# Altium PCB BLHP2432_H24-Fan-Controller.PcbDoc
Units mm, origin at the board's own origin, x right, y up, seen from the top; angles counter-clockwise.
Board outline 55 x 45 mm, 2 copper layers (Top Layer, Bottom Layer), stack 1.569 mm thick; 17 components, 18 nets, 59 pads, 0 vias.
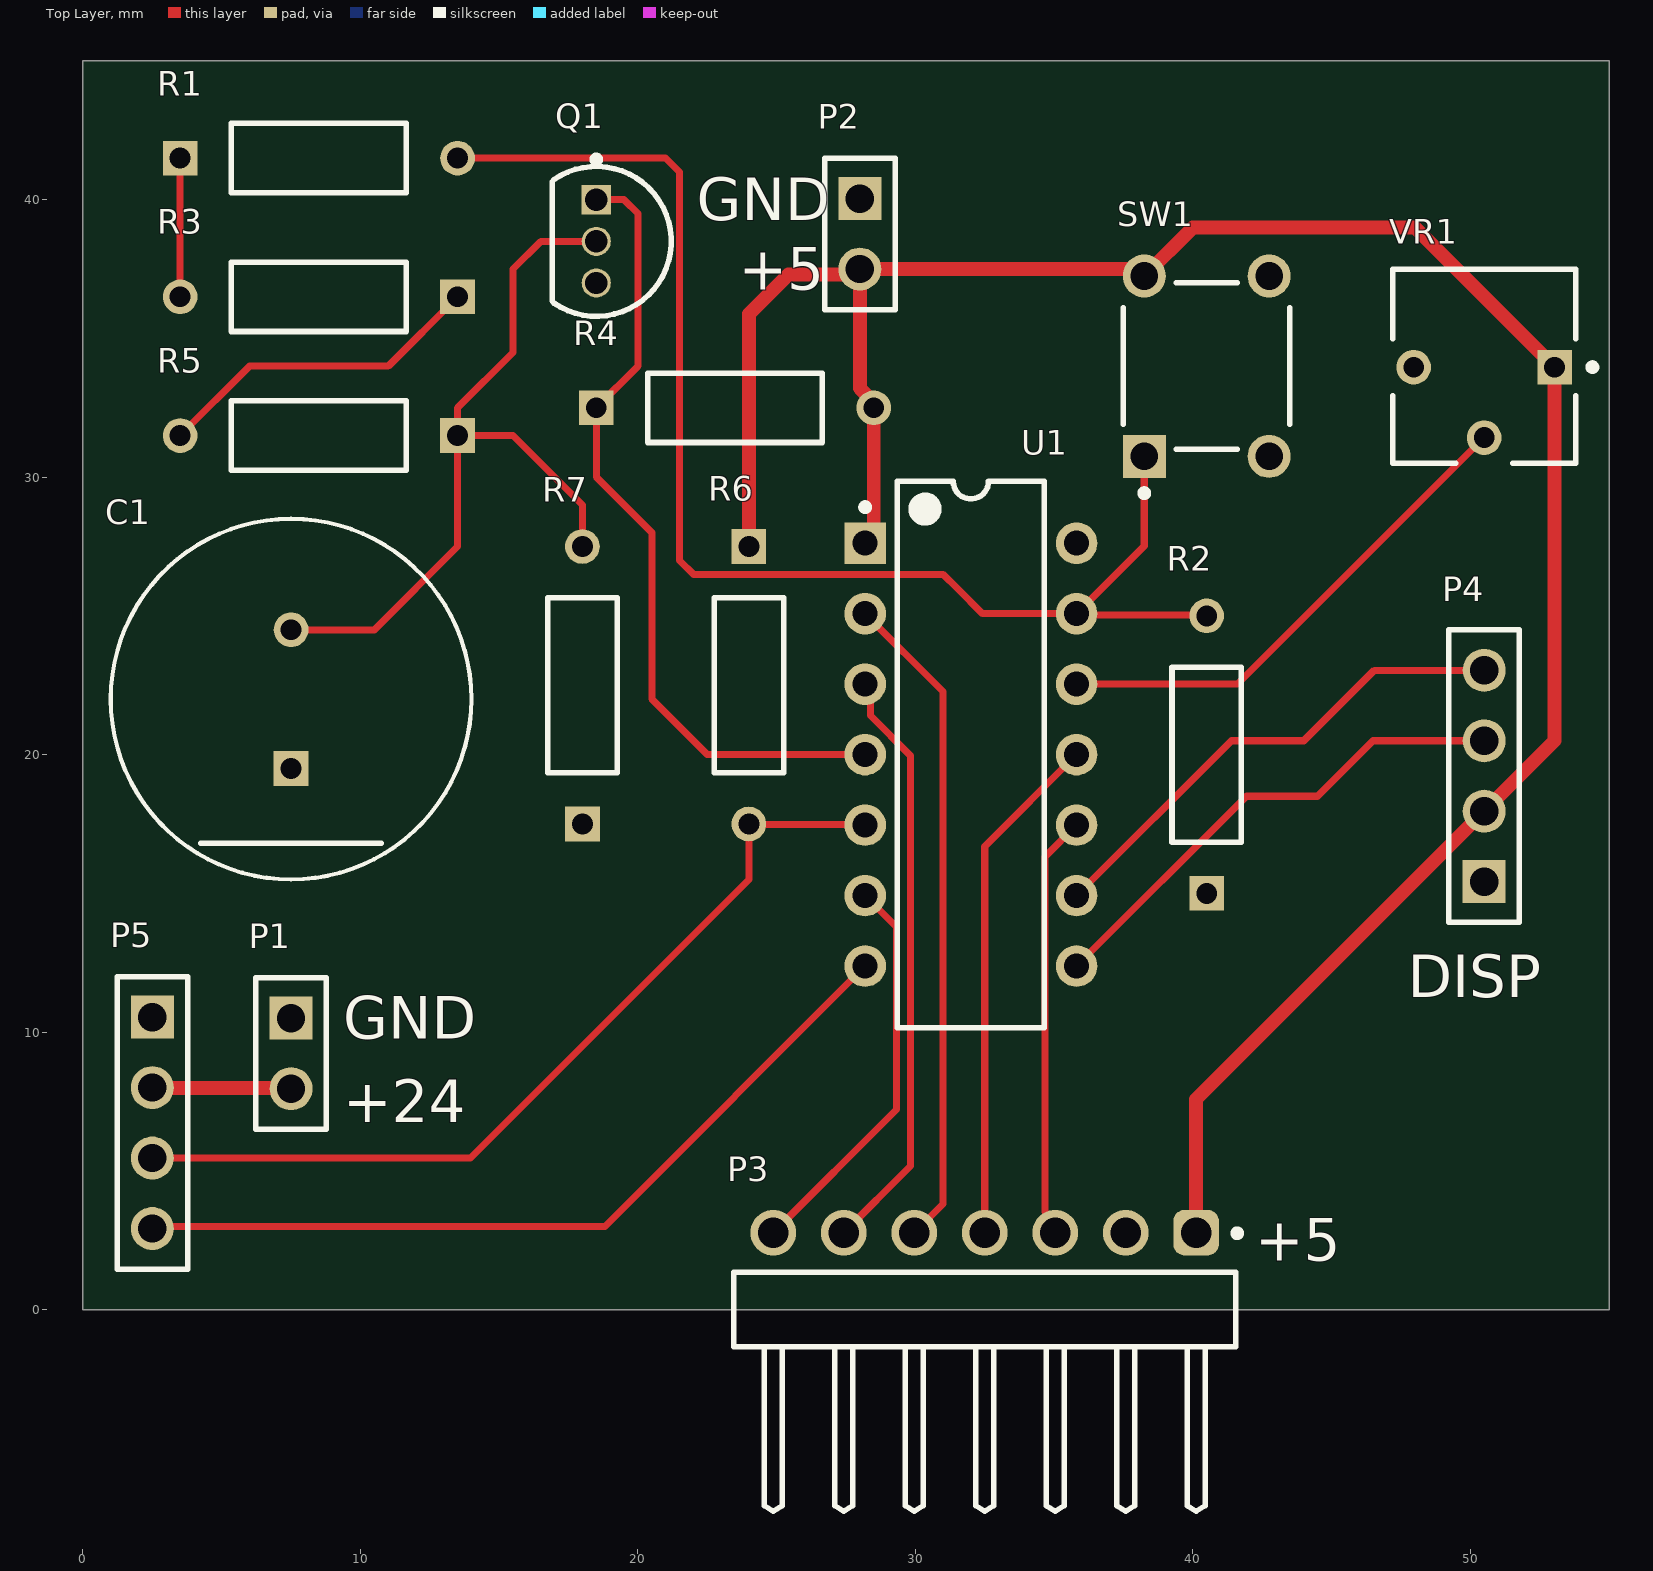
[diagram p0: Top Layer view]
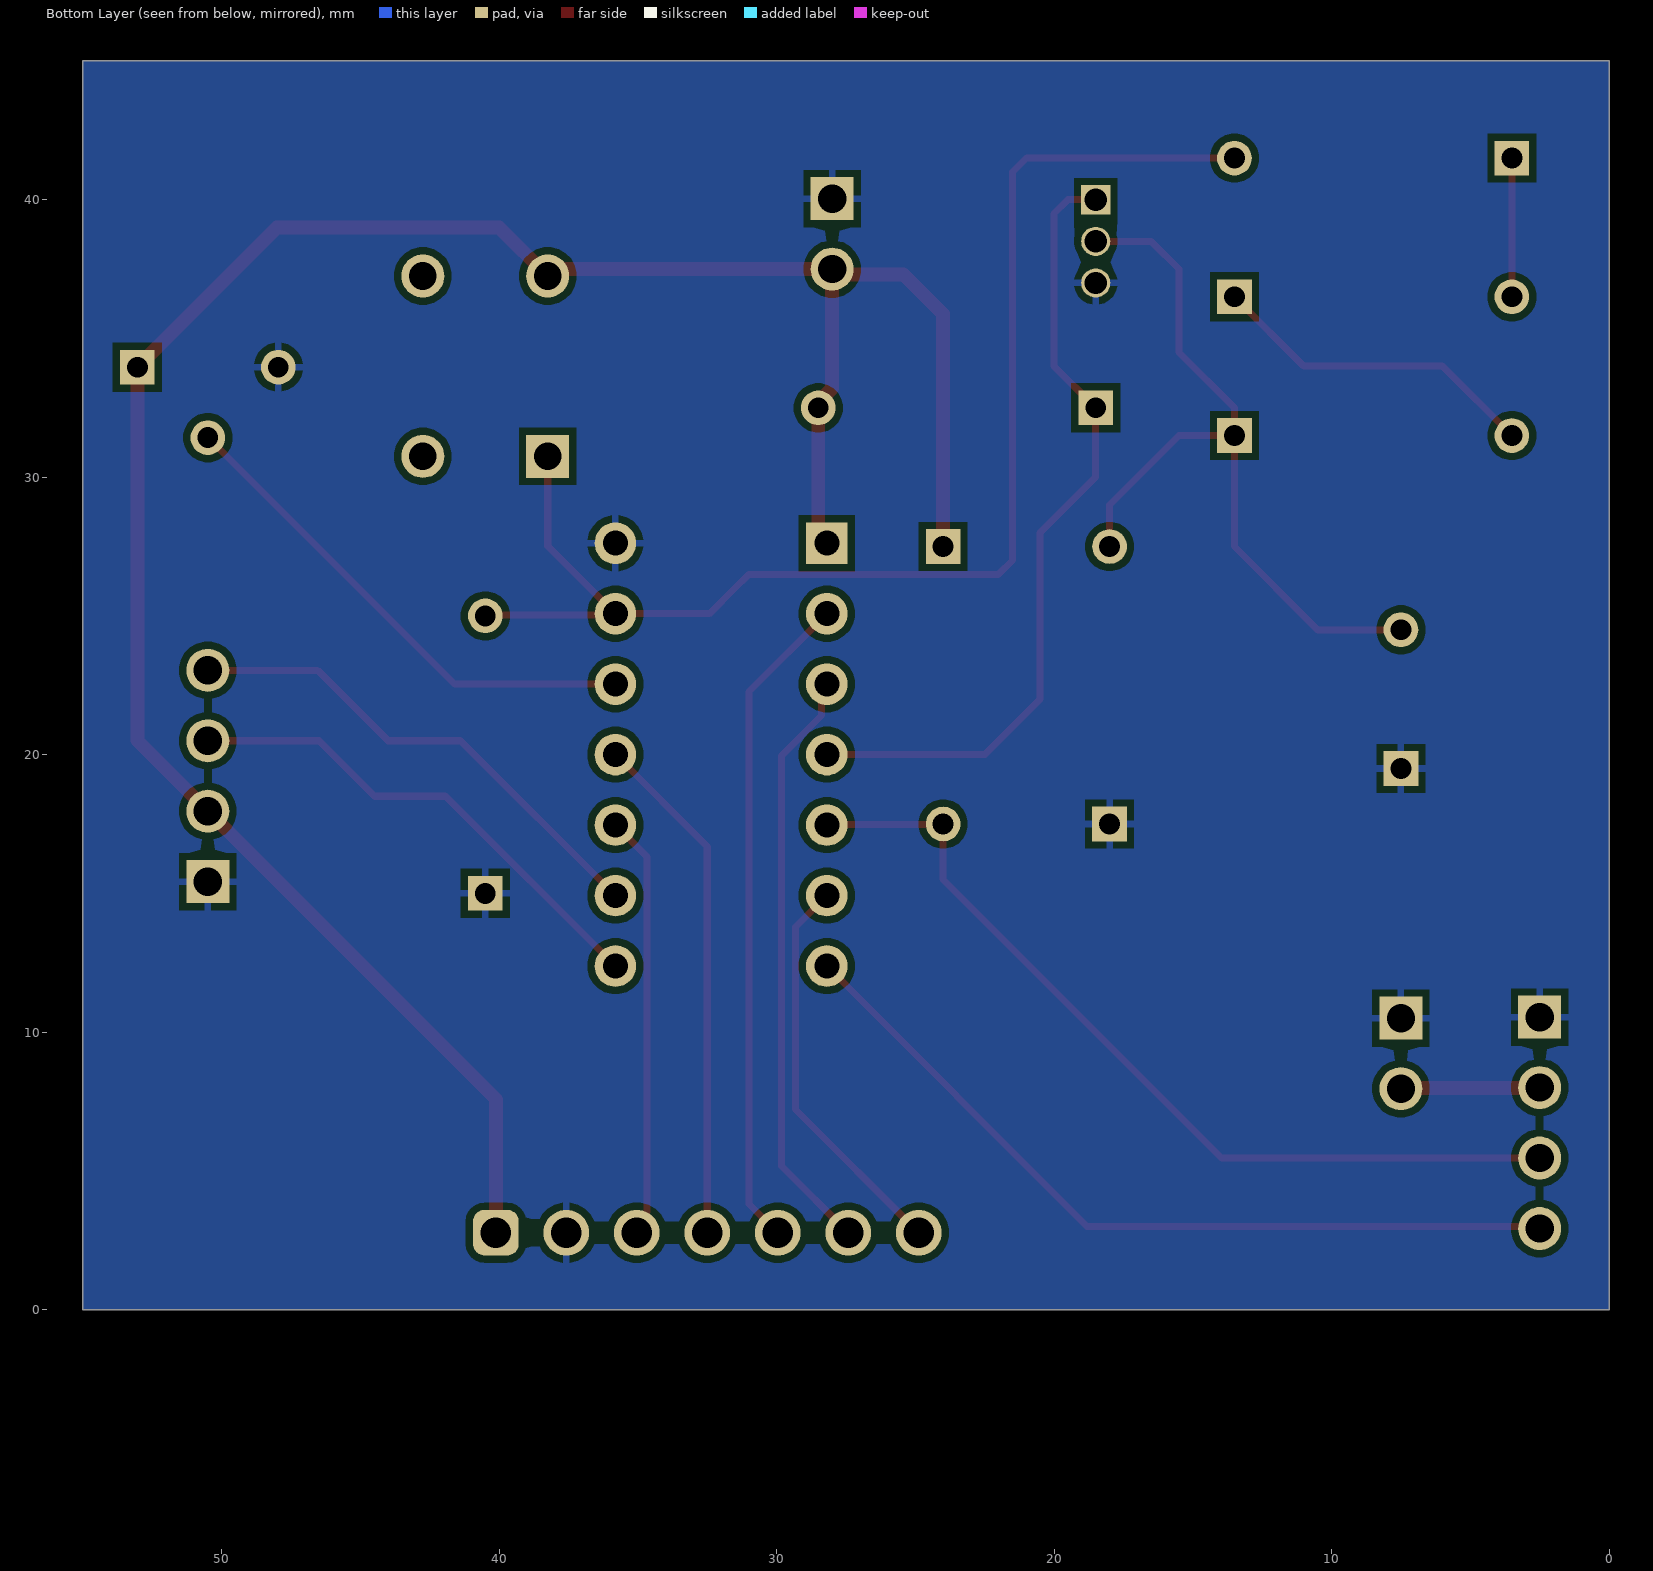
[diagram p1: Bottom Layer view, seen from below]
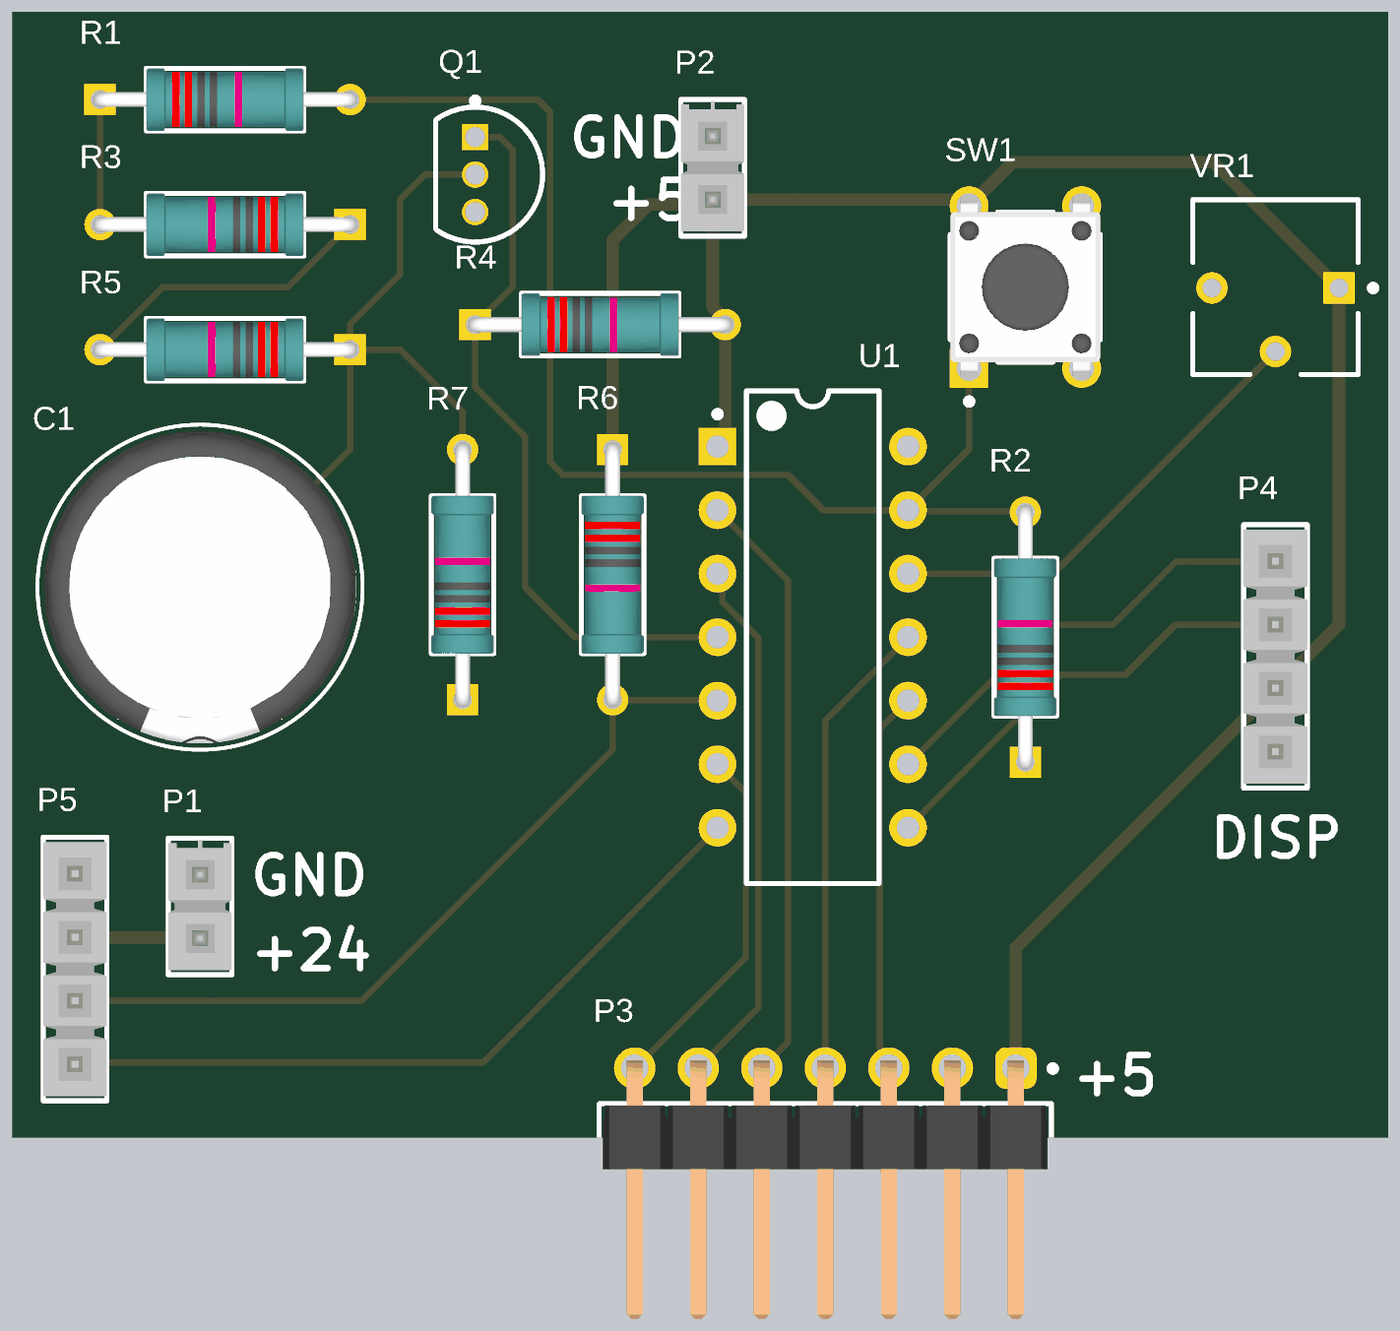
[diagram p2: 3D render of the assembled board from above, using the file's embedded part models]

## Layer stack, top to bottom
Top Solder: solder mask 0.0254, SM-001, Dk 4
Top Layer: signal copper 0.035
Dielectric 1: core 1.4986, Core-043, Dk 4.3
Bottom Layer: signal copper 0.035
Bottom Solder: solder mask 0.0254, SM-001, Dk 4

## Board outline
0,0 55,0 55,45 0,45

## Design rules (kind name [scope] priority, off if disabled: settings)
Clearance Clearance_1 [OnMid vs OnMid] p1: gap=0.254 ignorepadtopadclearanceinfootprint=FALSE sourcerule=42 cellrowname=All cellrowtype=0 cellcolname=All cellcoltype=0 innerlayers=TRUE
Clearance Clearance_2 [(ExistsOnLayer('Top Layer') Or ExistsOnLayer('Bottom Layer')) vs (ExistsOnLayer('Top Layer') Or ExistsOnLayer('Bottom Layer'))] p2: gap=0.254 ignorepadtopadclearanceinfootprint=FALSE sourcerule=42 cellrowname=All cellrowtype=0 cellcolname=All cellcoltype=0 outerlayers=TRUE
Clearance [All] p3: gap=0.254 ignorepadtopadclearanceinfootprint=FALSE ismatrix=TRUE
PolygonConnect [All] p1: connectstyle=Relief reliefconductorwidth=0.254 reliefentries=4 polygonreliefangle="90 Angle" airgapwidth=0.254
RoutingVias [All] p1: holewidth=0.711 width=1.27 viastyle="Through Hole" minholewidth=0.711 minwidth=1.27 maxholewidth=0.711 maxwidth=1.27
SolderMaskExpansion [All] p1: expansion=0 istentingtop=FALSE
SupplyNets "Schematic Supply Nets_2" [InNet('GND')] p1: voltage=0.000
SupplyNets "Schematic Supply Nets_1" [InNet('+24')] p2: voltage=0.000
SupplyNets "Schematic Supply Nets" [InNet('+5')] p3: voltage=0.000
Width "Schematic Width Constraint_2" [InNetClass('Power')] p1: maxlimit=0.5 minlimit=0.254 preferedwidth=0.5 minimp=50.000000 maximp=50.000000 favimp=50.000000
Width "Schematic Width Constraint_1" [InNet('+24')] p2: maxlimit=0.5 minlimit=0.5 preferedwidth=0.5 minimp=50.000000 maximp=50.000000 favimp=50.000000
Width "Schematic Width Constraint" [InNet('GND')] p3: maxlimit=0.5 minlimit=0.5 preferedwidth=0.5 minimp=50.000000 maximp=50.000000 favimp=50.000000
Width [All] p4: maxlimit=0.254 minlimit=0.254 preferedwidth=0.254
30 further rules are at their usual default settings.

## Classes and differential pairs
net class Power: +5 +24 GND

## Components (designator, comment, footprint, x,y, rotation, side; value= is the part's Value field where it differs from the comment)
C1 "100u" FP-UHW1E222MHD-MFG 7.5,22 r90 top
P1 "TSW-102-26-G-S" SMTC-TSW-102-26-XX-S 7.5,10.5 r270 top
P2 "TSW-102-26-G-S" SMTC-TSW-102-26-XX-S 28,40.04 r270 top
P3 "61300711021" 61300711021 32.5,0 r0 top
P4 "" SMTC-TSW-104-08-X-S 50.5,15.42 r90 top
P5 "" SMTC-TSW-104-08-X-S 2.5,10.54 r270 top
Q1 "BC547B" ONSC-TO-92-3-29-11 18.5,38.5 r270 top
R1 "10k" FP-MBB0207-MFG 8.5,41.5 r0 top
R2 "10k" FP-MBB0207-MFG 40.5,20 r90 top
R3 "10k" FP-MBB0207-MFG 8.5,36.5 r180 top
R4 "10k" FP-MBB0207-MFG 23.5,32.5 r0 top
R5 "10k" FP-MBB0207-MFG 8.5,31.5 r180 top
R6 "10k" FP-MBB0207-MFG 24,22.5 r270 top
R7 "5.1k" FP-MBB0207-MFG 18,22.5 r90 top
SW1 "MJTP1230A" FP-MJTP1230A-MFG 40.5,34 r90 top
U1 "ATtiny44A-PU" 14P3 32,20 r0 top
VR1 "3362P-1-103LF" BOUR-3362P 50.5,34 r180 top

## Footprints (in the part's own frame and the unit in brackets; to place one, negate y for a bottom-side part, rotate by r counter-clockwise, add the part's x,y. Pads: shape width x height; smd on the part's side, far side on the other; paste and mask are expansions set on the pad)
14P3 [mm] "DIP, 14-Pin, Row Spacing 7.62 mm, Pitch 2.54 mm"
  rect 1.5x1.5 hole 0.9: 1(-3.81,7.62)
  round 1.5 hole 0.9: 2(-3.81,5.08) 3(-3.81,2.54) 4(-3.81,0) 5(-3.81,-2.54) 6(-3.81,-5.08) 7(-3.81,-7.62) 8(3.81,-7.62) 9(3.81,-5.08) 10(3.81,-2.54) 11(3.81,0) 12(3.81,2.54) 13(3.81,5.08) 14(3.81,7.62)
  silkscreen extent -3.93,-9.85 2.65,9.85, body extent -3.55,-9.85 3.55,9.85, height 5.33
61300711021 [mm] "Pin Header, pitch 2.54 mm, THT, Angled, single row, 7p"
  rrect50% 1.65x1.65 hole 1.1: 1(7.62,2.77)
  round 1.65 hole 1.1: 2(5.08,2.77) 3(2.54,2.77) 4(0,2.77) 5(-2.54,2.77) 6(-5.08,2.77) 7(-7.62,2.77)
  silkscreen extent -9.04,-7.27 9.23,2.87, body extent -8.89,-7.27 8.89,3.09, height 2.58
BOUR-3362P [mm] "THD, 3-Leads, Body 6.6x6.99mm, Pitch 2.54mm"
  rect 1.25x1.25 hole 0.75: 1(-2.54,0.035)
  round 1.25 hole 0.75: 2(0,2.575) 3(2.54,0.035)
  silkscreen extent -4.03,-3.49 3.3,3.5, body extent -3.3,-3.49 3.3,3.49, height 4.95
FP-MBB0207-MFG [mm]
  rect 1.25x1.25 hole 0.75 paste-2539.97 mask+0: 1(-5,0)
  round 1.25 hole 0.75 paste-2539.97 mask+0: 2(5,0)
  silkscreen extent -3.15,-1.25 3.15,1.25, body extent -5.72,-1.35 5.72,1.35, height 0.25
FP-MJTP1230A-MFG [mm]
  rect 1.55x1.55 hole 1 paste-2539.97 mask+0: 1(-3.25,2.25)
  round 1.55 hole 1 paste-2539.97 mask+0: 2(3.25,2.25) 3(-3.25,-2.25) 4(3.25,-2.25)
  silkscreen extent -4.7,-3 3,3, body extent -4.13,-3.13 4.13,3.13, height 0.25
FP-UHW1E222MHD-MFG [mm]
  rect 1.25x1.25 hole 0.75 paste-2539.97 mask+0: 1(-2.5,0)
  round 1.25 hole 0.75 paste-2539.97 mask+0: 2(2.5,0)
  silkscreen extent -6.5,-6.5 6.5,6.5, body extent -6.6,-6.6 6.6,6.6, height 0.25
ONSC-TO-92-3-29-11 [mm] "TO, 3-Leads, Body Dia 4.7mm, Pitch 1.27mm"
  rect 1.05x1.05 hole 0.8: 1(-1.5,0)
  round 1.05 hole 0.8: 2(0,0) 3(1.5,0)
  silkscreen extent -3.07,-1.59 2.7,2.7, body extent -2.35,-1.33 2.36,2.36, height 7.87
SMTC-TSW-102-26-XX-S [mm] ".025 SQ Post Terminal Strip Assembly, 1x2 Pins, Vertical, 2.54mm Pitch, Male"
  rect 1.55x1.55 hole 1.02: 1(0,0)
  round 1.55 hole 1.02: 2(2.54,0)
  silkscreen extent -1.46,-1.27 4,1.27, body extent -1.4,-1.27 3.81,1.27, height 8.38
SMTC-TSW-104-08-X-S [mm] ".025 SQ Post Terminal Strip Assembly, 1x4 Pins, Vertical, 2.54mm Pitch, Male"
  rect 1.55x1.55 hole 1.02: 1(0,0)
  round 1.55 hole 1.02: 2(2.54,0) 3(5.08,0) 4(7.62,0)
  silkscreen extent -1.46,-1.27 9.08,1.27, body extent -1.27,-1.27 8.89,1.27, height 8.38

## Part data
C1: library part CMP-12462-000038-1, "CAP ALUM 2200UF 20% 25V RADIAL", Capacitance=2.2mF, Case/Package=Radial, Max Operating Temperature=105°C, Min Operating Temperature=-40°C, Package Quantity=100, Ripple Current=3.2A, Tolerance=20%, Voltage Rating=25V, Height - Seated (Max)=1.063inch, Impedance=15mR, Lead Pitch=0.197inch, Life (Hours)=10000Hour, Mount="Through Hole", Packaging=Bulk, RoHS Compliant=Yes, Series=HW
P1 P2: library part CMP-1024-00327-1, "0.025\" SQ Post Header, Through-hole, Vertical, -55 to 125 degC, 2.54 mm Pitch, 2-Pin, Male, RoHS", Manufacturer=Samtec, Temperature Range="-55 to 125 degC", ComponentLink1Description="Manufacturer URL", ComponentLink1URL=http://www.samtec.com, ComponentLink2Description=Datasheet, ComponentLink2URL=http://www.samtec.com/documents/webfiles/pdf/TSW_TH.PDF, ComponentLink3Description="Package Specification", ComponentLink3URL=http://www.samtec.com/documents/webfiles/cpdf/TSW-XXX-XX-XXX-X-XX-XXX-MKT.pdf, DatasheetVersion=F-214, Mounting Technology=Through-hole, Orientation=Vertical, PackageDescription=".025[0.64] SQ. Post Terminal Strip Assembly", PackageReference=TSW-102-26-XX-S, PackageVersion="DM, 8/1988", PartNumber=TSW-102-26-G-S, Pitch="2.54 mm", RoHS=True
P3: library part CMP-1502-01073-5, "THT Angled Pin Header WR-PHD, Pitch 2.54 mm, Single Row, 7 pins", Color=Black, Contact Resistance=20mΩ, Current Rating=3A, Max Operating Temperature=105°C, Min Operating Temperature=-40°C, Operating Supply Voltage=250V, Connector Type="Male Pin", Contact Material=Gold, Contact Mating Length=5.9944mm, Contact Plating=Gold, Gender=Male, Height=2.69mm, Lead Pitch=2.54mm, Mount="Through Hole", Number of Contacts=7, Number of Pins=7, Number of Positions=7, Number of Rows=1, Packaging=Bulk, Pitch=2.54mm, RoHS=Compliant, Termination=Solder, Voltage Rating=250V
P4 P5: library part CMP-1024-00357-1, "0.025\" SQ Post Header, Through-hole, Vertical, -55 to 125 degC, 2.54 mm Pitch, 4-Pin, Male, RoHS", Manufacturer=Samtec, PartNumber=TSW-104-08-G-S, Temperature Range="-55 to 125 degC", ComponentLink1Description="Manufacturer URL", ComponentLink1URL=http://www.samtec.com, ComponentLink2Description=Datasheet, ComponentLink2URL=http://www.samtec.com/documents/webfiles/pdf/TSW_TH.PDF, ComponentLink3Description="Package Specification", ComponentLink3URL=http://www.samtec.com/documents/webfiles/cpdf/TSW-XXX-XX-XXX-X-XX-XXX-MKT.pdf, DatasheetVersion=F-214, Mounting Technology=Through-hole, Orientation=Vertical, PackageDescription=".025[0.64] SQ. Post Terminal Strip Assembly", PackageReference=TSW-104-08-X-S, PackageVersion="DM, 8/1988", Pitch="2.54 mm", RoHS=True
Q1: library part CMP-1048-01467-1, "Amplifier Transistor, NPN Silicon, 3-Pin TO-92, Bulk Box", Manufacturer="On Semiconductor", ComponentLink1Description="Manufacturer URL", ComponentLink1URL=http://www.onsemi.com/, ComponentLink2Description=Datasheet, ComponentLink2URL=http://www.onsemi.com/pub_link/Collateral/BC546-D.PDF, ComponentLink3Description="Package Specification", ComponentLink3URL=http://www.onsemi.cn/pub_link/Collateral/2N6426-D.PDF, DatasheetVersion="Rev. 7", fT Min (MHz)=150, IC Continuous (A)=0.1, Mounting Technology="Through Hole", PackageDescription="3-Pin Transistor Outline, Body 4.825 x 3.685 mm, Pitch 1.27 mm", PackageReference=TO-92-3-29-11_AM_SL, PackageVersion="Rev. AM", Packing="Bulk Box", PartNumber=BC547B, Polarity=NPN, RoHS=FALSE
R1 R2 R3 R4 R5 R6 R7: library part CMP-02408-000035-1, "RES 10K OHM 0.6W 1% AXIAL", Case/Package=Conformal, Max Operating Temperature=155°C, Max Power Dissipation=600mW, Min Operating Temperature=-55°C, Resistance=10kR, Resistance Tolerance=1%, Resistor Type="Metal Film", Temperature Coefficient=50ppm/°C, Voltage Rating=300V, Construction=Cylindrical, Contact Plating=Tin, Diameter=2.5mm, Features="Automotive AEC-Q200", Lead Free="Lead Free", Length=6.5mm, Military Standard=Not, Number of Terminations=2, Packaging="Tape and Reel", Power Rating=600mW, Radiation Hardening=No, RoHS Compliant=Yes, Series="MBB 0207 - Professional", Technology="THIN FILM", Termination=Axial, Tolerance=1%, Voltage Rating (DC)=300V
SW1: library part CMP-47024-000004-1, "SWITCH TACTILE SPST-NO 0.05A 12V", Actuator Color=Black, Contact Resistance=100mR, Current Rating=50mA, Max Operating Temperature=70°C, Max Voltage Rating (DC)=12V, Min Operating Temperature=-20°C, Operating Force=160gf, Package Quantity=2000, Actuator Length=1.4mm, Actuator Material=Thermoplastic, Actuator Type=Standard, Color=Black, Contact Material=Bronze, Contact Plating=Silver, Electrical Life=100000Cycles, Illumination Type=Non-Illuminated, Mechanical Life=100000Cycles, Mount="Through Hole", Orientation=Straight, Packaging=Bulk, REACH SVHC="No SVHC", RoHS Compliant=Yes, Series=MJTP, Switch Function=Off-Mom, Switch Travel=0.25mm, Termination="PC Pin", Throw Configuration=SPST, Voltage Rating (DC)=12V
U1: library part CMP-0093-00042-2, "8-bit AVR Microcontroller,  20MHz, 1.8-5.5V, 4KB Flash, 256 Bytes EEPROM, 256 Bytes SRAM, 14-pin PDIP, Industrial Grade (-40°C to 85°C), Pb-Free", Code_JEDEC=MS-001-AA, ComponentLink1Description="Manufacturer URL", ComponentLink1URL=http://www.atmel.com/, ComponentLink2Description="ATtiny24A/44A/84A Datasheet", ComponentLink2URL=http://www.atmel.com/dyn/resources/prod_documents/doc8183.pdf, ComponentLink3Description="ATtiny24A/44A/84A Summary", ComponentLink3URL=http://www.atmel.com/dyn/resources/prod_documents/8183S.pdf, DatasheetVersion="revD, Apr-2011", PackageDescription="14-Lead Plastic Dual In-Line, 300 mil/7.62 mm Wide Body (PDIP)", PackageReference=14P3, PackageVersion="revB, Oct-2010", RevisionNote="DatasheetVersion updated. URLs added."
VR1: library part CMP-1747-00004-1, "Square Trimpot(R) Trimming Potentiometer, 10 KOhm, 300 V, -55 to 125 degC, 3-Pin THD, RoHS, Tube", Case Code (Imperial)=0612, Case Code (Metric)=1632, Case/Package=1206, Max Operating Temperature=125degC, Min Operating Temperature=-25degC, Package Quantity=5000, Power Rating="1 W", Resistance="50 mohm", Tolerance=1%, Voltage Rating="220 mV", ComponentLink1Description="Manufacturer URL", ComponentLink1URL=http://www.bourns.com/, ComponentLink2Description=Datasheet, ComponentLink2URL=http://www.bourns.com/docs/Product-Datasheets/3362.pdf, DatasheetVersion=May-16, Height="0.6 mm", Length="3.2 mm", Mount="Surface Mount", PackageDescription="3-Pin Through Hole Device, Body 6.6 x 6.99 mm, Pitch 2.54 mm", PackageReference=3326P, Packaging="Tape and Reel", Pins=2, REACH SVHC="No SVHC", RoHSCompliant=True, Width="1.6 mm"

## Nets (pads, with @x,y where several pads share a name; then routed paths per layer and width w, separated by ;. In a path a pad name is that pad's centre, name@x,y a point inside that pad or via, vN(x,y) a via of type N, cw(c..) or ccw(c..) an arc to the next point about the centre after c; other vN are vias at no path point)
+5: P2.2 P3.1 P4.2 R4.2 R6.1 SW1.2 U1.1 VR1.1 | length 87.8
  Top Layer w0.5: R6.1 24,35.875 25.424,37.299 27.799,37.299 P2.2 ; U1.1 28.5,27.93 R4.2 28.5,32.703 28,33.203 P2.2 ; P3.1 40.12,7.58 P4.2 53.04,20.5 VR1.1 48.005,39 40,39 SW1.2 37.966,37.25 37.716,37.5 P2.2
+24: P1.2 P5.2 | length 5
  Top Layer w0.5: P5.2 2.52,7.98 7.48,7.98 P1.2
DISP_CLK: P4.4 U1.9 | length 18.1
  Top Layer w0.254: U1.9 41.39,20.5 44,20.5 46.54,23.04 P4.4
DISP_DIO: P4.3 U1.8 | length 18.1
  Top Layer w0.254: U1.8 41.93,18.5 44.5,18.5 46.5,20.5 P4.3
FAN_FG: P5.3 R6.2 U1.5 | length 31.9
  Top Layer w0.254: P5.3 13.96,5.46 24,15.5 R6.2 24.02,17.48 28.17,17.48 U1.5
FAN_PWM: P5.4 U1.7 | length 29.6
  Top Layer w0.254: P5.4 2.58,3 18.81,3 U1.7
GND: C1.1 P1.1 P2.1 P3.2 P4.1 P5.1 Q1.3 R2.1 R7.1 U1.14 VR1.3
NetC1_2: C1.2 Q1.2 R5.1 R7.2 | length 28.5
  Top Layer w0.254: C1.2 10.5,24.5 13.5,27.5 R5.1 ; R7.2 18,29 15.5,31.5 R5.1 ; Q1.2 16.5,38.5 15.5,37.5 15.5,34.5 13.5,32.5 R5.1
NetR1_1: R1.1 R3.2 | length 5
  Top Layer w0.254: R3.2 R1.1
NetR3_1: R3.1 R5.2 | length 12.1
  Top Layer w0.254: R5.2 6,34 11,34 R3.1
PCINT2: P3.4 U1.11 | length 18.6
  Top Layer w0.254: P3.4 32.5,16.69 U1.11
PCINT3: P3.3 U1.10 | length 15.3
  Top Layer w0.254: P3.3 35.04,3.148 34.679,3.509 34.679,16.329 U1.10
PCINT7: P3.7 U1.6 | length 14.5
  Top Layer w0.254: P3.7 29.321,7.211 29.321,13.789 U1.6
PCINT8: P3.5 U1.2 | length 23.9
  Top Layer w0.254: U1.2 31,22.27 31,3.81 P3.5
PCINT9: P3.6 U1.3 | length 21.4
  Top Layer w0.254: P3.6 29.829,5.179 29.829,19.96 28.38,21.409 28.38,22.35 U1.3
RESET: Q1.1 R4.1 U1.4 | length 29.2
  Top Layer w0.254: Q1.1 19.5,40 20,39.5 20,34 R4.1 18.5,30 20.5,28 20.5,22 22.5,20 U1.4
UI_BTN: R1.2 R2.2 SW1.1 U1.13 | length 48.7
  Top Layer w0.254: R1.2 21,41.5 21.5,41 21.5,27 22.011,26.489 29.136,26.489 29.147,26.5 31,26.5 31.5,26 32.42,25.08 U1.13 ; SW1.1 38.25,27.52 U1.13 ; R2.2 40.46,25.04 35.85,25.04 U1.13
UI_POT: U1.12 VR1.2 | length 18.4
  Top Layer w0.254: U1.12 41.615,22.54 VR1.2
pads on no net: SW1.3 SW1.4

## Polygon pours and split planes (outlines as drawn)
GND on Bottom Layer "GND Plane" (solid, pour order 0): 0,0 55,0 55,45 0,45

## Silkscreen, mask and mechanical layers (free items; w line width, h text height)
Top Overlay:
  text "GND" at 22.129,39.254 h1.52
  text "+5" at 23.629,36.754 h1.52
  text "DISP" at 47.754,11.254 h1.52
  text "GND" at 9.379,9.754 h1.52
  text "+24" at 9.379,6.754 h1.52
  text "+5" at 42.254,1.754 h1.52